# Altium PCB motorboard_simp2.PcbDoc
Units mil, origin at the board's own origin, x right, y up, seen from the top; angles counter-clockwise.
Board outline 5000 x 6000 mil, 2 copper layers (Top Layer, Bottom Layer); 51 components, 63 nets, 132 pads, 0 vias.
Unrouted connection lines stored in the file: 70.
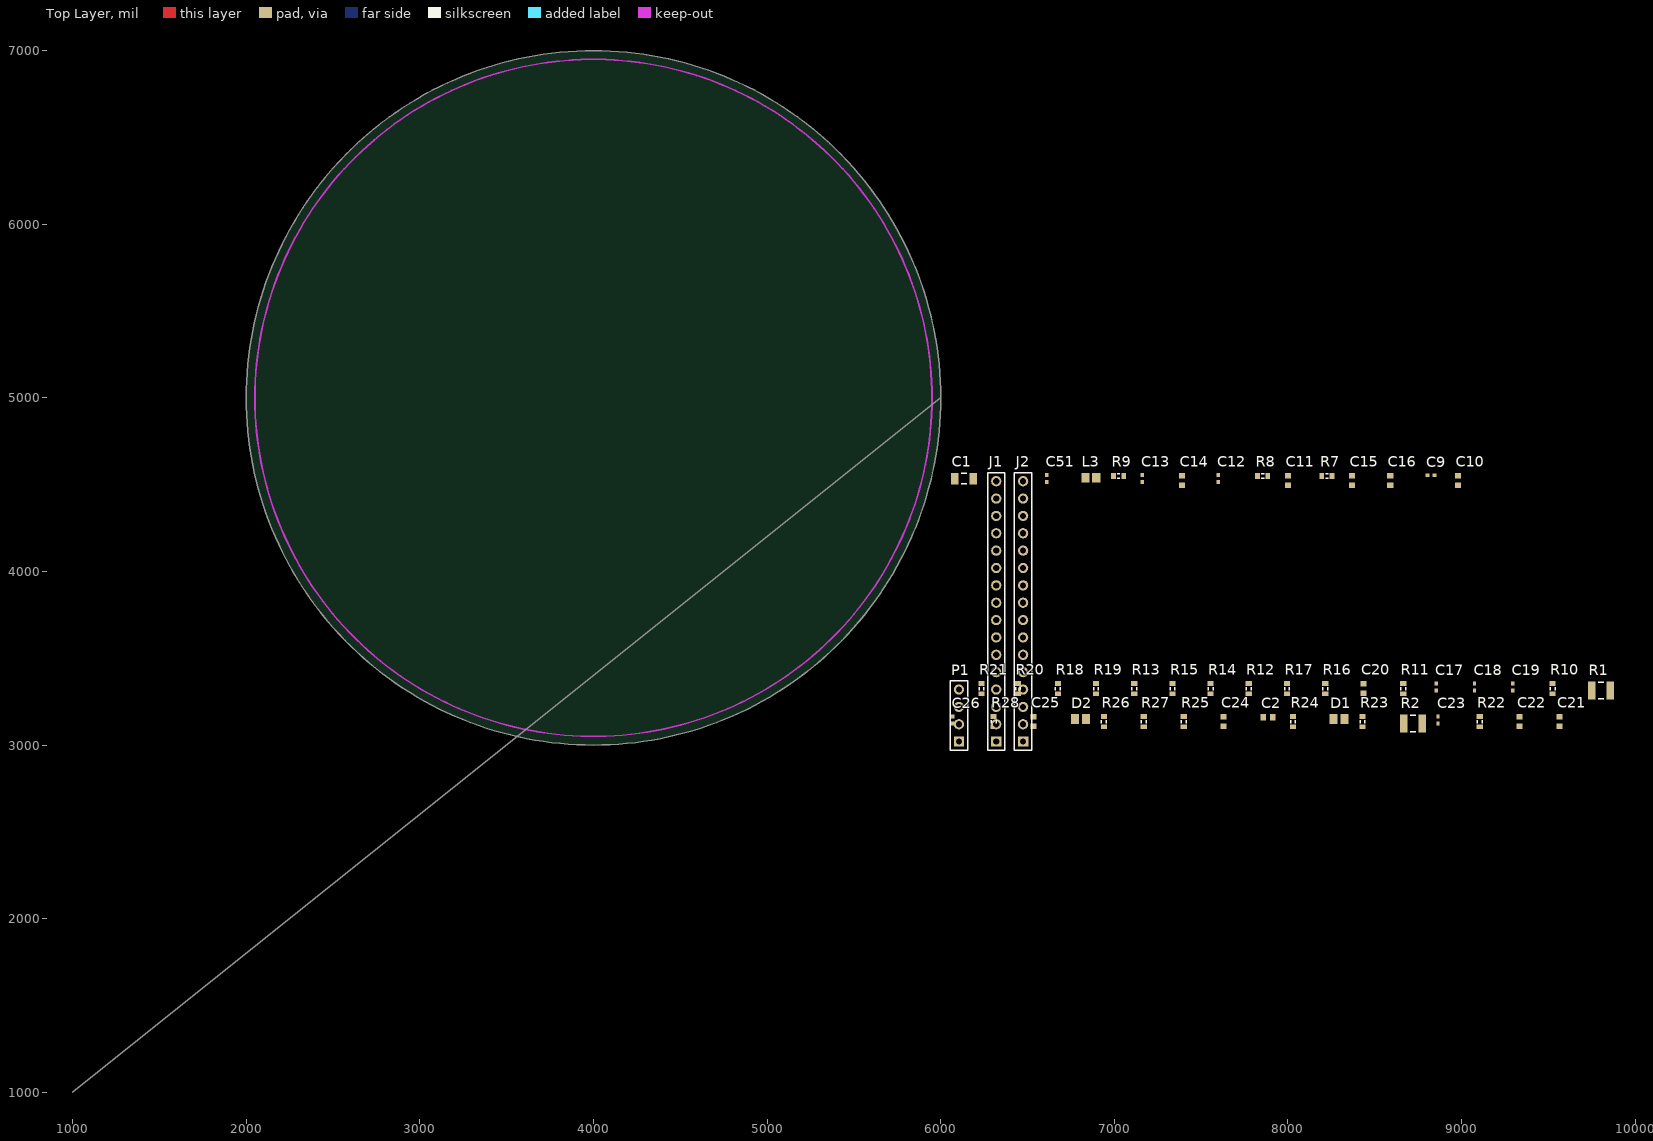
[diagram p0: Top Layer view]
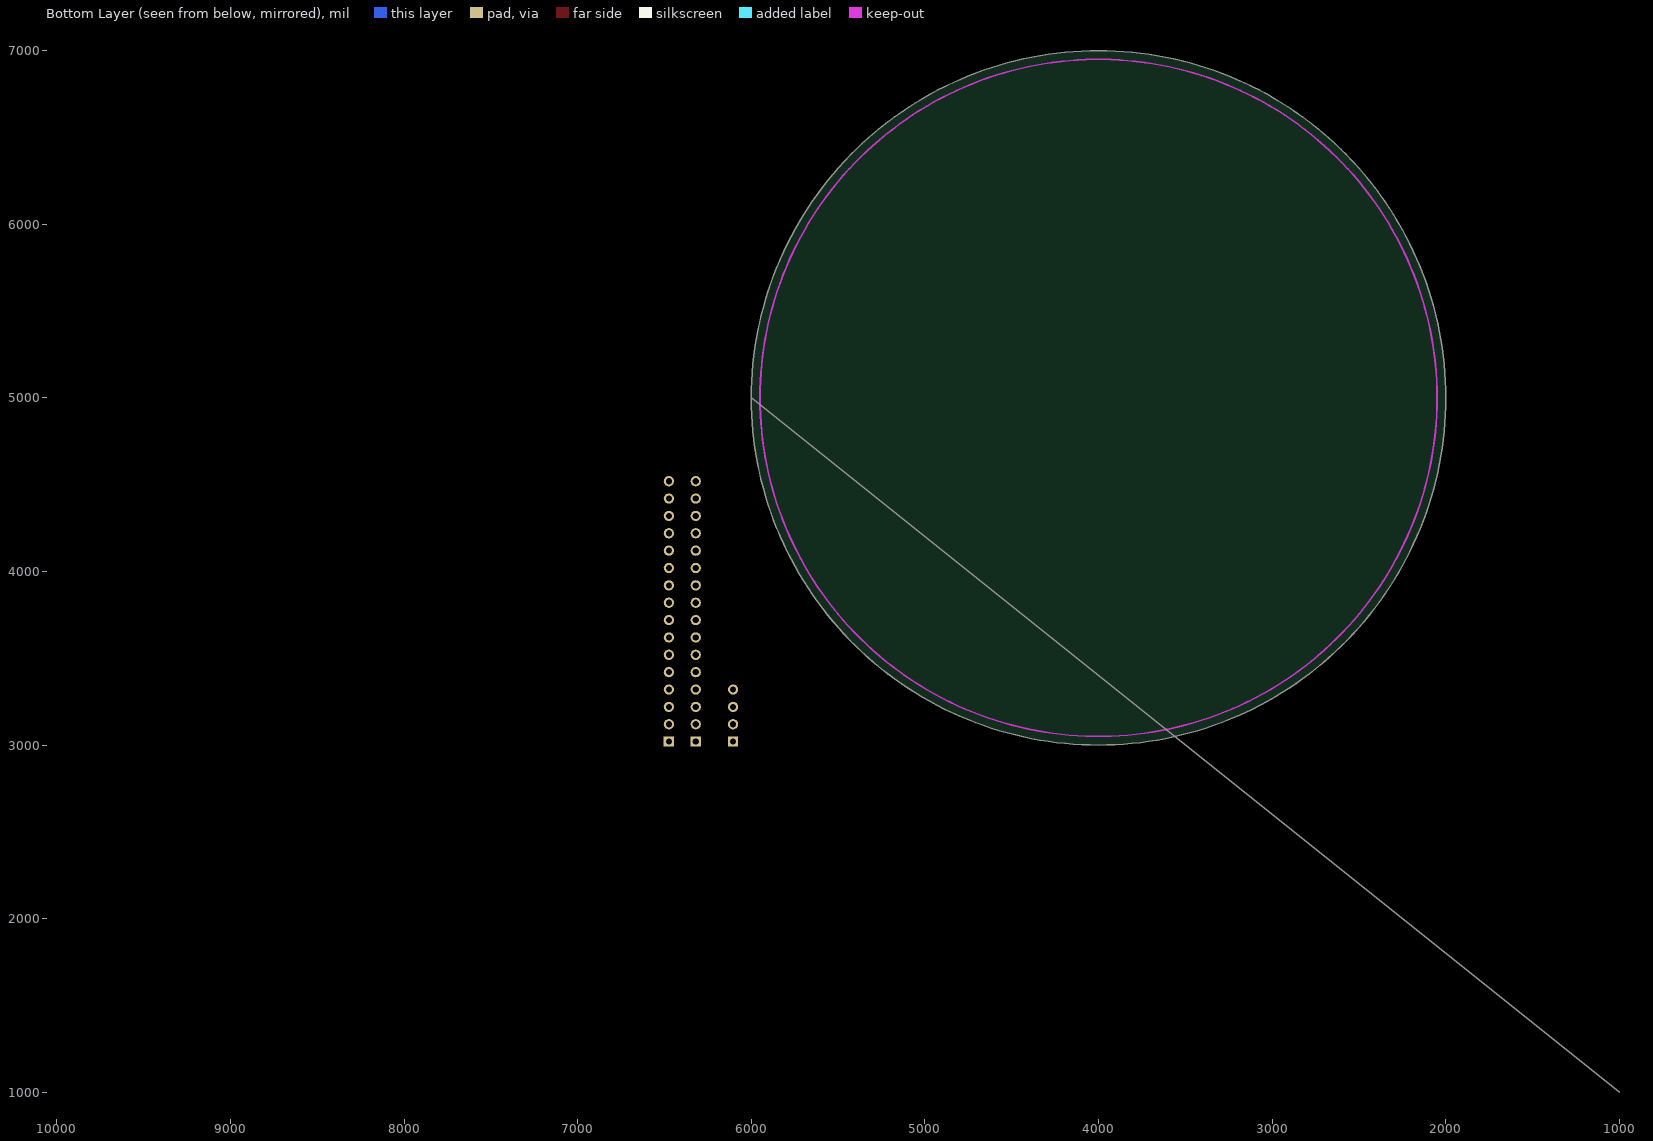
[diagram p1: Bottom Layer view, seen from below]

## Layer stack, top to bottom
Top Layer: signal copper 1.4
Dielectric: dielectric 12.6, FR-4, Dk 4.8
Bottom Layer: signal copper 1.4

## Board outline
6000,5000 ccw(c4000,5000) 4000,7000 ccw(c4000,5000) 2000,5000 ccw(c4000,5000) 4000,3000 ccw(c4000,5000) 1000,1000

## Design rules (kind name [scope] priority, off if disabled: settings)
Clearance [All] p1: gap=8
PolygonConnect [All] p1: connectstyle=Relief reliefconductorwidth=10 reliefentries=4 polygonreliefangle="90 Angle"
RoomDefinition motorboard_simp_GEH [InComponentClass('motorboard_simp_GEH')] p1: confinementstyle=ConfineIn formatcopy=TRUE lockcomponents=FALSE outline 6045,2960 9135,2960 9135,4680 6045,4680
RoomDefinition motorboard_simp_power [InComponentClass('motorboard_simp_power')] p2: confinementstyle=ConfineIn formatcopy=TRUE lockcomponents=FALSE outline 6045,3060 9710,3060 9710,3290 6045,3290
RoomDefinition motorboard_simp [InComponentClass('motorboard_simp')] p3: confinementstyle=ConfineIn formatcopy=TRUE lockcomponents=FALSE outline 6045,2960 9895,2960 9895,3480 6045,3480
RoutingVias [All] p1: holewidth=25 width=40 viastyle="Through Hole" minholewidth=28 minwidth=50 maxholewidth=28 maxwidth=50
SilkscreenOverComponentPads [All] p1: minsilkscreentomaskgap=10
SolderMaskExpansion [All] p1: expansion=4
Width "Schematic Width Constraint_14" [InNet('3.3V')] p1: maxlimit=100 minlimit=10 preferedwidth=25 minimp=50.000000 maximp=50.000000 favimp=50.000000
Width "Schematic Width Constraint_13" [InNet('VBAT_SW')] p2: maxlimit=50 minlimit=10 preferedwidth=25 minimp=50.000000 maximp=50.000000 favimp=50.000000
Width "Schematic Width Constraint_12" [InNet('VBAT +300')] p3: maxlimit=25 minlimit=10 preferedwidth=25 minimp=50.000000 maximp=50.000000 favimp=50.000000
Width "Schematic Width Constraint_11" [InNet('VBAT')] p4: maxlimit=25 minlimit=10 preferedwidth=25 minimp=50.000000 maximp=50.000000 favimp=50.000000
Width "Schematic Width Constraint_10" [InNet('NetJ3_1')] p5: maxlimit=25 minlimit=10 preferedwidth=25 minimp=50.000000 maximp=50.000000 favimp=50.000000
Width "Schematic Width Constraint_9" [InNet('NetL2_1')] p6: maxlimit=25 minlimit=10 preferedwidth=25 minimp=50.000000 maximp=50.000000 favimp=50.000000
Width "Schematic Width Constraint_8" [InNet('NetL2_2')] p7: maxlimit=25 minlimit=10 preferedwidth=25 minimp=50.000000 maximp=50.000000 favimp=50.000000
Width "Schematic Width Constraint_7" [InNet('5VUSB_SW')] p8: maxlimit=25 minlimit=10 preferedwidth=25 minimp=50.000000 maximp=50.000000 favimp=50.000000
Width "Schematic Width Constraint_6" [InNet('GND')] p9: maxlimit=25 minlimit=10 preferedwidth=25 minimp=50.000000 maximp=50.000000 favimp=50.000000
Width "Schematic Width Constraint_5" [InNet('VBAT_MOT_SW')] p10: maxlimit=25 minlimit=10 preferedwidth=20 minimp=50.000000 maximp=50.000000 favimp=50.000000
Width "Schematic Width Constraint_4" [InNet('MOT1_B')] p11: maxlimit=25 minlimit=10 preferedwidth=20 minimp=50.000000 maximp=50.000000 favimp=50.000000
Width "Schematic Width Constraint_3" [InNet('MOT_0A')] p12: maxlimit=25 minlimit=10 preferedwidth=20 minimp=50.000000 maximp=50.000000 favimp=50.000000
Width "Schematic Width Constraint_2" [InNet('MOT_0B')] p13: maxlimit=25 minlimit=10 preferedwidth=20 minimp=50.000000 maximp=50.000000 favimp=50.000000
Width "Schematic Width Constraint_1" [InNet('9V_OUT')] p14: maxlimit=25 minlimit=10 preferedwidth=20 minimp=50.000000 maximp=50.000000 favimp=50.000000
Width "Schematic Width Constraint" [InNet('MOT1_A')] p15: maxlimit=25 minlimit=10 preferedwidth=20 minimp=50.000000 maximp=50.000000 favimp=50.000000
Width [All] p16: maxlimit=8 minlimit=8 preferedwidth=8
27 further rules are at their usual default settings.

## Classes and differential pairs
component class motorboard_simp: C17 C18 C19 C20 CasterBack CasterFront MOT_L MOT_R P1 R1 R10 R11 R12 R13 R14 R15 R16 R17 R18 R19 R20 R21 U5 U6 U7
component class motorboard_simp_power: C2 C21 C22 C23 C24 C25 C26 D1 D2 J3 L1 L2 R2 R22 R23 R24 R25 R26 R27 R28 TP1 U8
component class motorboard_simp_GEH: C1 C9 C10 C11 C12 C13 C14 C15 C16 C51 J1 J2 L3 R7 R8 R9 U3 U4

## Components (designator, comment, footprint, x,y, rotation, side; value= is the part's Value field where it differs from the comment)
C1 "Cap Semi" CAPC3216L 6135,4535 r0 top
C2 "Cap" CAPC1608L 7885,3160 r0 top
C9 "Cap Semi" CAPC1005L 8825,4555 r0 top
C10 "Cap Semi" CAPC1608L 8980,4525 r90 top
C11 "Cap Semi" CAPC1608L 8000,4525 r90 top
C12 "Cap Semi" CAPC1005L 7600,4535 r90 top
C13 "Cap Semi" CAPC1005L 7160,4535 r90 top
C14 "Cap Semi" CAPC1608L 7390,4525 r90 top
C15 "Cap Semi" CAPC1608L 8370,4525 r90 top
C16 "Cap Semi" CAPC1608L 8590,4525 r90 top
C17 "Cap Semi" CAPC1005L 8855,3335 r90 top
C18 "Cap Semi" CAPC1005L 9075,3335 r90 top
C19 "Cap Semi" CAPC1005L 9295,3335 r90 top
C20 "Cap Semi" CAPC1608L 8435,3325 r90 top
C21 "Cap" CAPC1608L 9565,3135 r90 top
C22 "Cap" CAPC1608L 9335,3135 r90 top
C23 "Cap" CAPC1005L 8865,3145 r90 top
C24 "Cap" CAPC1608L 7630,3135 r90 top
C25 "Cap" CAPC1608L 6535,3135 r90 top
C26 "Cap" CAPC1005L 6070,3145 r90 top
C51 "Cap Semi" CAPC1005L 6610,4535 r90 top
D1 "Charge" INDC2012L 8295,3150 r0 top
D2 "Power" INDC2012L 6805,3150 r0 top
J1 "Header 16" HDR1X16 6320,3020 r90 top
J2 "Header 16" HDR1X16 6475,3020 r90 top
L3 "Inductor" INDC2012L 6865,4540 r0 top
P1 "Header 4" HDR1X4 6105,3020 r90 top
R1 "Res3" RESC3225L 9805,3315 r0 top
R2 "Res3" RESC3225L 8720,3125 r0 top
R7 "Res3" RESC1608L 8225,4550 r0 top
R8 "Res3" RESC1608L 7855,4550 r0 top
R9 "Res3" RESC1608L 7025,4550 r0 top
R10 "" RESC1608L 9525,3325 r90 top
R11 "" RESC1608L 8665,3325 r90 top
R12 "Res3" RESC1608L 7775,3325 r90 top
R13 "Res3" RESC1608L 7115,3325 r90 top
R14 "Res3" RESC1608L 7555,3325 r90 top
R15 "Res3" RESC1608L 7335,3325 r90 top
R16 "" RESC1608L 8215,3325 r90 top
R17 "" RESC1608L 7995,3325 r90 top
R18 "Res3" RESC1608L 6675,3325 r90 top
R19 "Res3" RESC1608L 6895,3325 r90 top
R20 "" RESC1608L 6445,3325 r90 top
R21 "" RESC1608L 6235,3325 r90 top
R22 "Res3" RESC1608L 9105,3135 r90 top
R23 "Res3" RESC1608L 8430,3135 r90 top
R24 "Res3" RESC1608L 8030,3135 r90 top
R25 "Res3" RESC1608L 7400,3135 r90 top
R26 "Res3" RESC1608L 6940,3135 r90 top
R27 "Res3" RESC1608L 7170,3135 r90 top
R28 "Res3" RESC1608L 6305,3135 r90 top

## Footprints (in the part's own frame and the unit in brackets; to place one, negate y for a bottom-side part, rotate by r counter-clockwise, add the part's x,y. Pads: shape width x height; smd on the part's side, far side on the other; paste and mask are expansions set on the pad)
CAPC1005L [mm] "Chip Capacitor, Body 1.0x0.5mm, IPC High Density"
  rect 0.6x0.5 smd: 1(-0.5,0) 2(0.5,0)
  body extent -0.55,-0.3 0.55,0.3, height 1.3
CAPC1608L [mm] "Chip Capacitor, Body 1.6x0.8mm, IPC High Density"
  rect 0.8x0.9 smd: 1(-0.7,0) 2(0.7,0)
  body extent -0.87,-0.48 0.87,0.48, height 1.3
CAPC3216L [mm] "Chip Capacitor, Body 3.2x1.6mm, IPC High Density"
  rect 1.1x1.7 smd: 1(-1.35,0) 2(1.35,0)
  silkscreen extent -0.4,-0.75 0.4,0.75, body extent -1.7,-0.9 1.7,0.9, height 1.3
HDR1X4 [mm] "Connector; Header; 4 Position"
  rect 1.5x1.5 hole 0.9: 1(0,0)
  round 1.5 hole 0.9: 2(2.54,0) 3(5.08,0) 4(7.62,0)
  silkscreen extent -1.27,-1.27 8.89,1.27
HDR1X16 [mm] "Connector; Header; 16 Position"
  rect 1.5x1.5 hole 0.9: 1(0,0)
  round 1.5 hole 0.9: 2(2.54,0) 3(5.08,0) 4(7.62,0) 5(10.16,0) 6(12.7,0) 7(15.24,0) 8(17.78,0) 9(20.32,0) 10(22.86,0) 11(25.4,0) 12(27.94,0) 13(30.48,0) 14(33.02,0) 15(35.56,0) 16(38.1,0)
  silkscreen extent -1.27,-1.27 39.37,1.27
INDC2012L [mm] "Chip Inductor, Body 2.0x1.2mm, IPC High Density"
  rect 1.2x1.4 smd: 1(-0.8,0) 2(0.8,0)
  body extent -1.1,-0.7 1.1,0.7, height 0.55
RESC1608L [mm] "Chip Resistor, Body 1.6x0.8mm, IPC High Density"
  rect 0.7x0.9 smd: 1(-0.75,0) 2(0.75,0)
  silkscreen extent -0.2,-0.35 0.2,0.35, body extent -0.85,-0.48 0.85,0.48, height 0.9
RESC3225L [mm] "Chip Resistor, Body 3.2x2.5mm, IPC High Density"
  rect 1.1x2.6 smd: 1(-1.35,0) 2(1.35,0)
  silkscreen extent -0.4,-1.2 0.4,1.2, body extent -1.68,-1.32 1.68,1.32, height 0.9

## Part data
C1 C9 C10 C11 C12 C13 C14 C15 C16 C17 C18 C19 C20 C51: "Capacitor (Semiconductor SIM Model)"
C2 C21 C22 C23 C24 C25 C26: "Capacitor"
D1 D2: library part LED2, "Typical RED, GREEN, YELLOW, AMBER GaAs LED"
J1 J2: "Header, 16-Pin"
P1: "Header, 4-Pin"
R1 R2 R7 R8 R9 R12 R13 R14 R15 R18 R19 R22 R23 R24 R25 R26 R27 R28: "Resistor"
R10 R11 R16 R17 R20 R21: library part Res3, "Resistor"

## Nets (pads, with @x,y where several pads share a name; then routed paths per layer and width w, separated by ;. In a path a pad name is that pad's centre, name@x,y a point inside that pad or via, vN(x,y) a via of type N, cw(c..) or ccw(c..) an arc to the next point about the centre after c; other vN are vias at no path point)
3.3V: C1.2 C25.2 D1.1 J2.16 L3.2 R11.2 R20.2 R26.1 R27.2
3.3VLDO: C2.1
5VUSB_SW: C22.2 J2.15
9V_OUT: P1.1
CHRG: R24.1
CHRGEN: J2.12 P1.4 R25.2
GND: C1.1 C2.2 C9.1 C10.1 C11.1 C14.1 C15.1 C16.1 C20.1 C21.1 C22.1 C23.1 C24.2 C25.1 C51.1 D2.2 J1.7 J2.3 P1.2 R10.2 R12.2 R13.2 R14.2 R15.2 R16.1 R17.1 R18.2 R19.2 R21.1 R22.1 R23.2 R25.1 R28.2
GYRO_VREF: J1.8
GYROA_X_1: C11.2 R7.1
GYROA_X_4: J1.11
GYROA_Z_1: C14.2 R8.1
GYROA_Z_4: J1.10
MOT0_CUR: J2.1 R19.1
MOT0_PWMA: J2.4 R15.1
MOT0_PWMB: J2.5 R14.1
MOT1_A: 
MOT1_B: 
MOT1_CUR: J2.2 R18.1
MOT1_PWMA: J2.6 R13.1
MOT1_PWMB: J2.7 R12.1
MOT_0A: 
MOT_0B: 
NetC12_1: C12.1 R9.2
NetC12_2: C12.2 C13.2
NetC13_1: C13.1 R9.1
NetC17_1: C17.1
NetC17_2: C17.2
NetC18_1: C18.1
NetC18_2: C18.2
NetC19_2: C19.2
NetC23_2: C23.2 R22.2
NetC26_1: C26.1 R26.2 R28.1
NetC26_2: C26.2
NetD1_2: D1.2 R24.2
NetD2_1: D2.1 R27.1
NetJ3_1: R2.2
NetL1_1: 
NetL2_1: 
NetL2_2: 
NetMOT_L_A: R11.1
NetMOT_R_A: R20.1
NetR7_2: R7.2
NetR8_2: R8.2
NetR23_1: R23.1
QEI_0A: J2.8
QEI_0A_ANALOG: R16.2
QEI_0B: J2.9
QEI_0B_ANALOG: R10.1
QEI_1A: J2.10
QEI_1A_ANALOG: R21.2
QEI_1B: J2.11
QEI_1B_ANALOG: R17.2
SPI_MISO: J1.1
SPI_MOSI: J1.2
SPI_SCK: J1.3
SPI_SS_ACCEL: J1.4
SPI_SS_AUDIO: J1.5
SPI_SS_LED: J1.6
VBAT: J2.14 R2.1
"VBAT +300": C21.2 C24.1
VBAT_MOT_SW: C19.1 C20.2 R1.2
VBAT_SW: J2.13 P1.3 R1.1
VDDA: C9.2 C10.2 C15.2 C16.2 C51.2 L3.1
pads on no net: J1.9 J1.12 J1.13 J1.14 J1.15 J1.16

## Keep-outs
Keep-Out Layer:
  circle w10: c4000,5000 r1950

## Silkscreen, mask and mechanical layers (free items; w line width, h text height)
Drill Drawing:
  text ".LEGEND" at 6200,3200 h60
  text "Drill Drawing." at 6200,3100 h60

## Dimensions
5950,5000 to 2050,5000 on Mechanical 1